# EAGLE board Forklift Safety Alert System (EAGLE 9.7.0)

Size 275.32 x 93.39 mm. Coordinates in mm from the lower left corner, seen from the top.
Outline: 0,0 275.32,0 275.32,93.39 0,93.39 0,0
Copper layers (1*16): Top 0.035mm / dielectric 1.5mm / Bottom 0.035mm
Design rules "default": minimum track width 6mil, minimum drill 0.35mm, track to track 6mil, track to pad 6mil, pad to pad 6mil, via to via 6mil, smd to smd 6mil, copper to edge 40mil, drill to drill 6mil, minimum pad ring 10mil, minimum via ring 8mil, stop-mask expansion 4mil, vias tented up to drill 0mil, thermal gap 10mil

## Footprints (pad centres in the part's own frame; a part is rotated, then mirrored left to right if it is on the bottom)
LEDRD254W60D565H860B_B = drill 0.981 pad 1.581: 1 -1.27,0; 2 1.27,0
LEDRD254W60D565H860B = drill 0.981 pad 1.581: 1 -1.27,0; 2 1.27,0
DIODE-AXIAL = drill 1: 1 -5.08,0; 2 5.08,0
LEDRD254W60D565H860B_G = drill 0.981 pad 1.581: 1 -1.27,0; 2 1.27,0
MOTOR = drill 1.118 pad 3.15 octagon: + 2.54,0; - -2.54,0
PIEZO = drill 1 pad 1.6: 1 -3.5,0; 2 3.5,0
28027 = drill 1.016 long: 1 -2.54,0; 2 0,0; 3 2.54,0
RESAD1016W63L850D250B = drill 0.83 pad 1.43: 1 -5.08,0; 2 5.08,0
HA-06-SM065 = drill 1 pad 1.676: 1 -2.54,-2.54; 2 0,2.54; 3 2.54,-2.54
SWITCH-SPDT-PTH-8.5X3.7MM = drill 1.016 pad 1.88: 1 -2.54,0; 2 0,0; 3 2.54,0
TO92 = drill 0.813 octagon: 1 -1.27,0; 2 0,1.905; 3 1.27,0
ARDUINO-UNO-R3-SHIELD = drill 1.016 pad 1.88: 3.3V 24.13,-2.54; 5V 24.13,0; A0 24.13,12.7; A1 24.13,15.24; A2 24.13,17.78; A3 24.13,20.32; A4 24.13,22.86; A5 24.13,25.4; AREF -24.13,-13.97; D2 -24.13,20.32; D3 -24.13,17.78; D4 -24.13,15.24; D5 -24.13,12.7; D6 -24.13,10.16; D7 -24.13,7.62; D8 -24.13,3.81; D9 -24.13,1.27; D10 -24.13,-1.27; D11 -24.13,-3.81; D12 -24.13,-6.35; D13 -24.13,-8.89; GND@0 24.13,2.54; GND@1 24.13,5.08; GND@2 -24.13,-11.43; IOREF 24.13,-7.62; NC 24.13,-10.16; RES 24.13,-5.08; RX -24.13,25.4; SCL -24.13,-19.05; SDA -24.13,-16.51; TX -24.13,22.86; VIN 24.13,7.62

## Placement (x,y rotation side)
D1  BLUE  [LEDRD254W60D565H860B_B]  118.48,39.45 180 top
D2  RED  [LEDRD254W60D565H860B]  148.96,34.37 180 top
D3  DIODEDIODE-AXIAL  [DIODE-AXIAL]  109.59,16.59 180 top
D4  GREEN  [LEDRD254W60D565H860B_G]  225.16,21.67 180 top
D5  RED  [LEDRD254W60D565H860B]  110.86,39.45 180 top
M1  MOTOR_HDR  [MOTOR]  119.28,85.14 0 top
PIEZO1  PIEZO  [PIEZO]  176.9,34.37 0 top
PIR1  PIR-SENSOR_28027  [28027]  254.37,57.23 0 top
R1  10k  [RESAD1016W63L850D250B]  124.83,36.91 0 top
R2  10k  [RESAD1016W63L850D250B]  155.31,31.83 180 top
R3  1k  [RESAD1016W63L850D250B]  231.51,16.59 180 top
R4  2.2k  [RESAD1016W63L850D250B]  134.99,16.59 0 top
R6  1k  [RESAD1016W63L850D250B]  201.03,8.97 90 top
R8  1k  [RESAD1016W63L850D250B]  112.13,34.37 90 top
RPOT1  250k  [HA-06-SM065]  244.21,21.67 0 top
S1  TOGGLE  [SWITCH-SPDT-PTH-8.5X3.7MM]  63.32,85.58 0 top
T1  NPN  [TO92]  129.91,21.67 0 top
U1  ARDUINO-UNO-R3-SHIELD  [ARDUINO-UNO-R3-SHIELD]  47.88,37.54 270 top

## Library data of the parts
D1 = Tinkercad; CATEGORY: Opto-Electronic; SUB-CATEGORY: LED; VALUE: LED_BLUE
D2 D5 = Tinkercad; CATEGORY: Opto-Electronic; SUB-CATEGORY: LED; VALUE: LED_RED
D3 M1 PIEZO1 PIR1 R1-R4 R6 R8 RPOT1 S1 U1 = Tinkercad
D4 = Tinkercad; CATEGORY: Opto-Electronic; SUB-CATEGORY: LED; VALUE: LED_GREEN
T1 = Tinkercad; CATEGORY: Transistor; SUB-CATEGORY: BJT; TYPE: NPN

## Nets
D1_A: D1.1 R1.1
D2_A: D2.1 R2.2
D4_A: D4.1 R3.2
M1_-: D3.1 M1.- T1.1
T1_B: R4.1 T1.2
U1_5V: D3.2 M1.+ PIR1.2 RPOT1.3 S1.3 U1.5V
U1_A0: RPOT1.2 U1.A0
U1_D2: R1.2 U1.D2
U1_D3: S1.2 U1.D3
U1_D5: PIR1.1 U1.D5
U1_D9: R4.2 U1.D9
U1_D10: PIEZO1.1 U1.D10
U1_D11: R3.1 U1.D11
U1_D12: D5.1 R8.1 R8.2 U1.D12
U1_D13: R2.1 U1.D13
U1_GND: D1.2 D2.2 D4.2 D5.2 PIEZO1.2 PIR1.3 R6.1 RPOT1.1 S1.1 T1.3 U1.GND@0 U1.GND@1 U1.GND@2

## Tracks (layer width: path | path; a pad name or v marks a point on that pad's centre or on a via)
D1_A  (1 unrouted)
D2_A  (1 unrouted)
D4_A  (1 unrouted)
M1_-  (2 unrouted)
T1_B  (1 unrouted)
U1_5V  (5 unrouted)
U1_A0  (1 unrouted)
U1_D2  (1 unrouted)
U1_D3  (1 unrouted)
U1_D5  (1 unrouted)
U1_D9  (1 unrouted)
U1_D10  (1 unrouted)
U1_D11  (1 unrouted)
U1_D12  (3 unrouted)
U1_D13  (1 unrouted)
U1_GND  (12 unrouted)